# Altium PCB MAGI'sDIPBoard-2x.PcbDoc
Units mil, origin at the board's own origin, x right, y up, seen from the top; angles counter-clockwise.
Board outline 6000 x 4000 mil, 2 copper layers (Top Layer, Bottom Layer); 5 components, 49 nets, 109 pads, 0 vias.
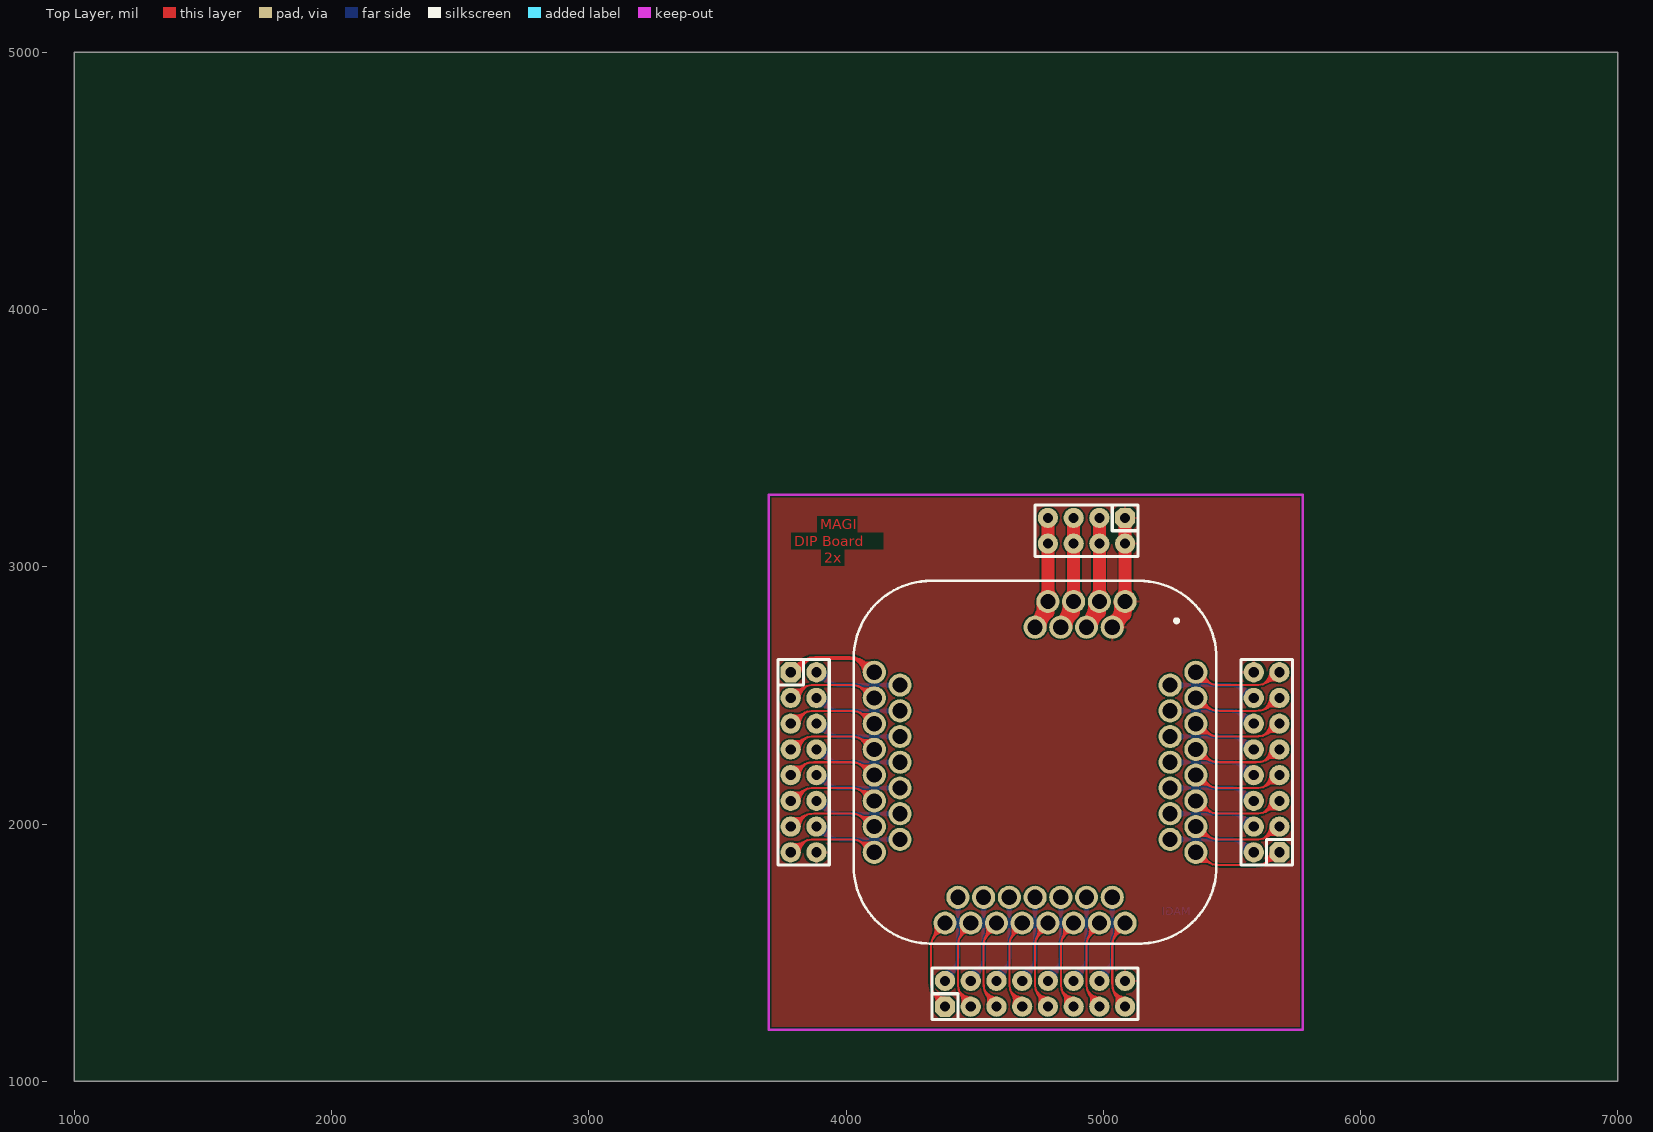
[diagram p0: Top Layer view]
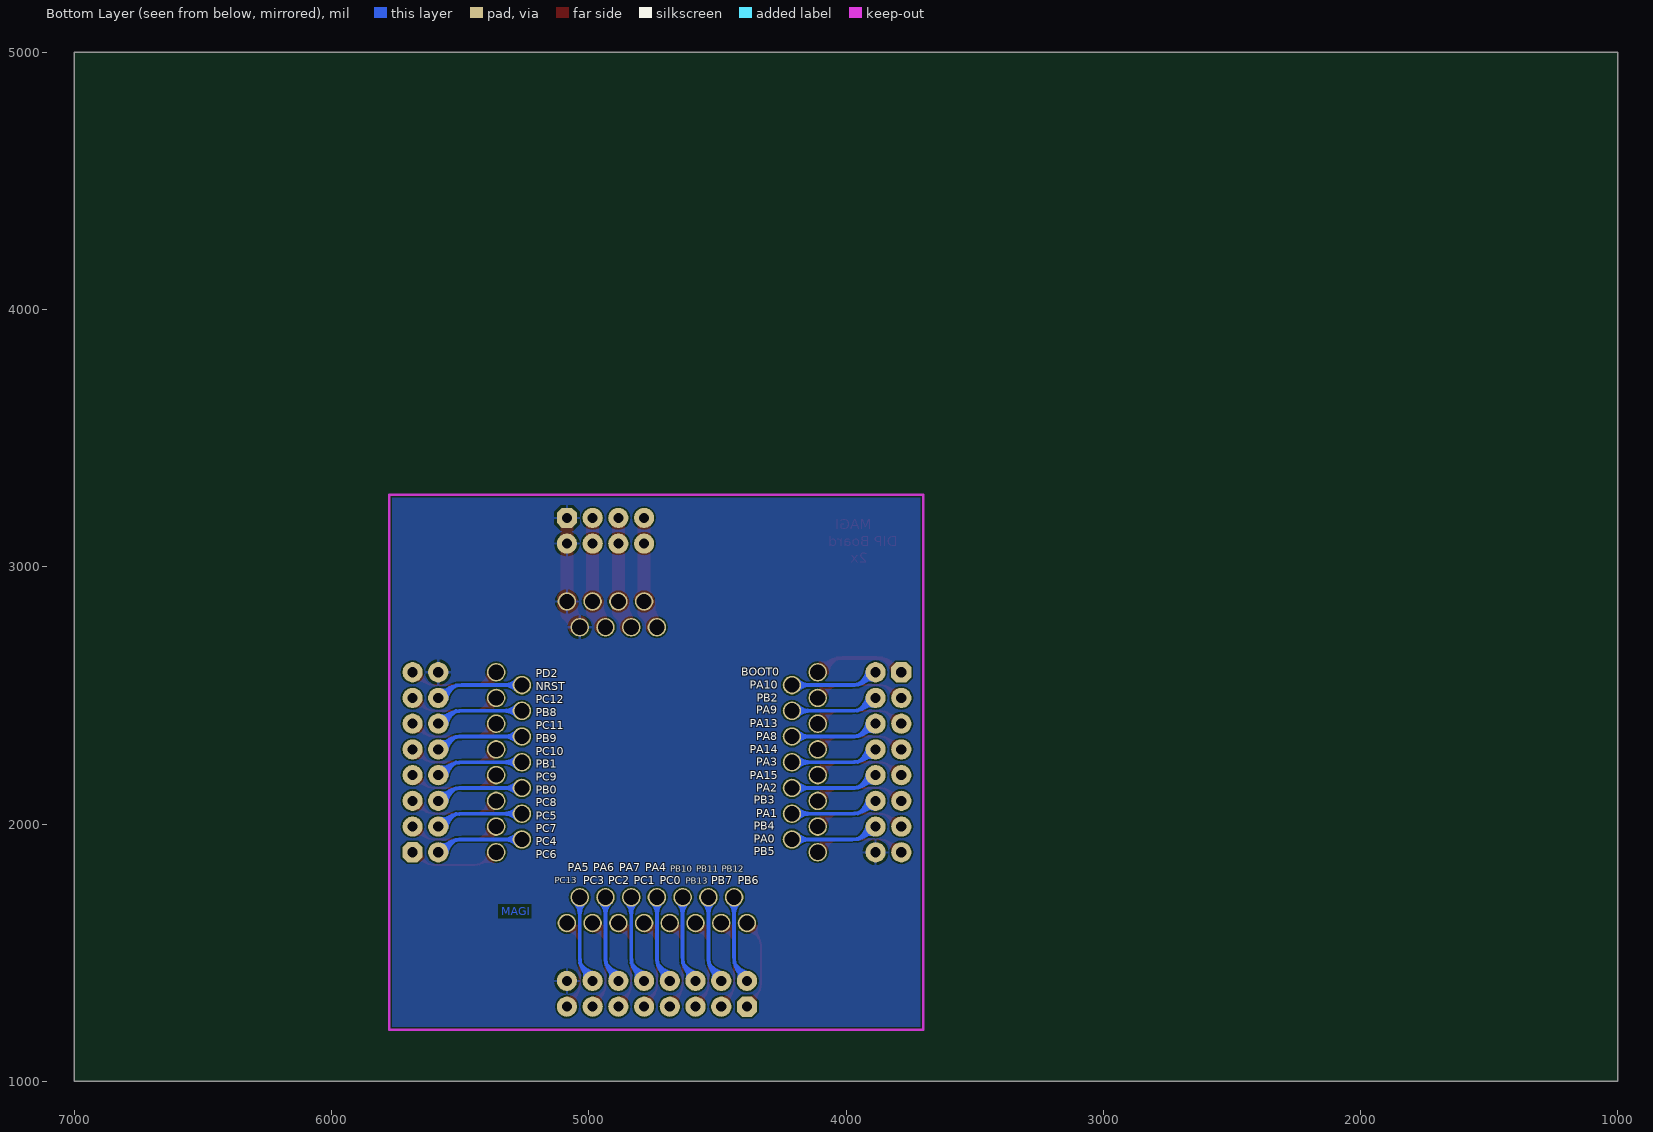
[diagram p1: Bottom Layer view, seen from below]

## Layer stack, top to bottom
Top Solder: solder mask 0.4, Solder Resist, Dk 3.5
Top Layer: signal copper 1.4
Dielectric 1: dielectric 12.6, FR-4, Dk 4.8
Bottom Layer: signal copper 1.4
Bottom Solder: solder mask 0.4, Solder Resist, Dk 3.5

## Board outline
1000,1000 7000,1000 7000,5000 1000,5000

## Design rules (kind name [scope] priority, off if disabled: settings)
Clearance [All] p1: gap=6
PolygonConnect [All] p1: connectstyle=Relief reliefconductorwidth=10 reliefentries=4 polygonreliefangle="90 Angle" airgapwidth=10
RoutingVias [All] p1: holewidth=28 width=50 viastyle="Through Hole" minholewidth=28 minwidth=50 maxholewidth=28 maxwidth=50
SolderMaskExpansion [All] p1: expansion=4
Width [All] p1: maxlimit=100 minlimit=6 preferedwidth=10
29 further rules are at their usual default settings.

## Components (designator, comment, footprint, x,y, rotation, side; value= is the part's Value field where it differs from the comment)
CON1 "" idc10 5085,3190 r180 top
J1 "" MAGIsBoard-2x 4735,2240 r0 top
J2 "" idc16 5685,1890 r90 top
J3 "" idc16 3785,2590 r270 top
J4 "" idc16 4385,1290 r0 top

## Footprints (in the part's own frame and the unit in brackets; to place one, negate y for a bottom-side part, rotate by r counter-clockwise, add the part's x,y. Pads: shape width x height; smd on the part's side, far side on the other; paste and mask are expansions set on the pad)
idc10 [mm]
  oct 2x2 hole 1: 1(0,0)
  round 2 hole 1: 2(0,2.54) 3(2.54,0) 4(2.54,2.54) 5(5.08,0) 6(5.08,2.54) 7(7.62,0) 8(7.62,2.54)
  silkscreen extent -1.27,-1.27 8.89,3.81
idc16 [mm]
  oct 2x2 hole 1: 1(0,0)
  round 2 hole 1: 2(0,2.54) 3(2.54,0) 4(2.54,2.54) 5(5.08,0) 6(5.08,2.54) 7(7.62,0) 8(7.62,2.54) 9(10.16,0) 10(10.16,2.54) 11(12.7,0) 12(12.7,2.54) 13(15.24,0) 14(15.24,2.54) 15(17.78,0) 16(17.78,2.54)
  silkscreen extent -1.27,-1.27 19.05,3.81
MAGIsBoard-2x [mil]
  round 90 / inner round 90 / far side round 72 hole 59.06: 1(300,525) 1(350,625) 2(200,525) 2(250,625) 3(100,525) 3(150,625) 4(0,525) 4(50,625) 8(-525,300) 9(-525,200) 10(-525,100) 11(-525,0) 12(-525,-100) 13(-525,-200) 14(-525,-300) 15(-300,-525) 16(-200,-525) 17(-100,-525) 18(0,-525) 19(100,-525) 20(200,-525) 21(300,-525) 22(525,-300) 23(525,-200) 24(525,-100) 25(525,0) 26(525,100) 27(525,200) 28(525,300) 29(-625,350) 30(-625,250) 31(-625,150) 32(-625,50) 33(-625,-50) 34(-625,-150) 35(-625,-250) 36(-625,-350) 37(-350,-625) 38(-250,-625) 39(-150,-625) 40(-50,-625) 41(50,-625) 42(150,-625) 43(250,-625) 44(350,-625) 45(625,-350) 46(625,-250) 47(625,-150) 48(625,-50) 49(625,50) 50(625,150) 51(625,250) 52(625,350)
  silkscreen extent -705,-705 705,705

## Part data
CON1: library part CON10_1, "Connector"
J1: library part MAGIsBoard-2x
J2 J3 J4: library part CON16, "Connector"

## Nets (pads, with @x,y where several pads share a name; then routed paths per layer and width w, separated by ;. In a path a pad name is that pad's centre, name@x,y a point inside that pad or via, vN(x,y) a via of type N, cw(c..) or ccw(c..) an arc to the next point about the centre after c; other vN are vias at no path point)
GND: CON1.1 CON1.2 J1.1 J2.16 J3.16 J4.16 | length 854.2
  Top Layer w50: J1.1@5029.82,2784.32 ccw(c5017.33,2830.96) 5059.14,2806.82 ccw(c5100.95,2782.67) J1.1@5054.32,2770.18 ; J1.1@5035,2785 ccw(c5035,2833.28) 5069.14,2799.14 ccw(c5103.28,2765) J1.1@5055,2765 ; J1.1@5065.31,2861.49 cw(c4957.73,2842.28) 5035,2765 5085,2815 5085,2865 CON1.2 CON1.1 ; J1.1@5070.86,2850.86 cw(c5036.72,2816.72) 5085,2816.72 cw(c5133.28,2816.72) J1.1@5099.14,2850.86 ; J1.1@5070.86,2879.14 ccw(c5036.72,2913.28) 5085,2913.28 ccw(c5133.28,2913.28) J1.1@5099.14,2879.14
NetCON1_3: CON1.3 CON1.4 J1.2 | length 719.8
  Top Layer w50: J1.2@4935,2765 J1.2@4935,2772.48 ; J1.2@4954.32,2770.18 cw(c5013.29,2785.98) 4960.42,2816.5 ; J1.2@4955,2765 cw(c5021.34,2765) 4974.43,2811.91 ; J1.2@4965.19,2862.27 cw(c4859.73,2847.75) J1.2@4935,2772.48 ; J1.2@4970.86,2879.14 ccw(c4936.72,2913.28) 4985,2913.28 ccw(c5033.28,2913.28) J1.2@4999.14,2879.14 ; CON1.3 CON1.4 4985,2865 4985,2822.48 J1.2@4935,2772.48
NetCON1_5: CON1.5 CON1.6 J1.3 | length 719.8
  Top Layer w50: J1.3@4835,2765 J1.3@4835,2772.48 ; J1.3@4854.32,2770.18 cw(c4913.29,2785.98) 4860.42,2816.5 ; J1.3@4855,2765 cw(c4921.34,2765) 4874.43,2811.91 ; J1.3@4865.19,2862.27 cw(c4759.73,2847.75) J1.3@4835,2772.48 ; J1.3@4870.86,2879.14 ccw(c4836.72,2913.28) 4885,2913.28 ccw(c4933.28,2913.28) J1.3@4899.14,2879.14 ; CON1.5 CON1.6 4885,2865 4885,2822.48 J1.3@4835,2772.48
NetCON1_7: CON1.7 CON1.8 J1.4 | length 719.8
  Top Layer w50: J1.4@4735,2765 J1.4@4735,2772.48 ; J1.4@4754.32,2770.18 cw(c4813.29,2785.98) 4760.42,2816.5 ; J1.4@4755,2765 cw(c4821.34,2765) 4774.43,2811.91 ; J1.4@4765.19,2862.27 cw(c4659.73,2847.75) J1.4@4735,2772.48 ; J1.4@4770.86,2879.14 ccw(c4736.72,2913.28) 4785,2913.28 ccw(c4833.28,2913.28) J1.4@4799.14,2879.14 ; CON1.7 CON1.8 4785,2865 4785,2822.48 J1.4@4735,2772.48
NetJ1_8: J1.8 J3.2 | length 602.8
  Bottom Layer w15: J3.2 3905.71,2569.29 ccw(c3976.42,2640) 3976.42,2540 J1.8 ; J3.2@3893.25,2559.22 cw(c3906.46,2509.9) 3931.99,2554.12 ; J3.2@3901.62,2592.9 ccw(c3952.2,2601.74) 3926.53,2557.27 ; J3.2@3916.39,2595.48 ccw(c3993.42,2608.94) 3954.33,2541.22 ; J1.8@4189.85,2519.85 ccw(c4141.19,2471.19) 4141.19,2540 ccw(c4141.19,2608.81) J1.8@4189.85,2560.15
NetJ1_9: J1.9 J3.4 | length 602.8
  Bottom Layer w15: J3.4 3905.71,2469.29 ccw(c3976.42,2540) 3976.42,2440 J1.9 ; J3.4@3893.25,2459.22 cw(c3906.46,2409.9) 3931.99,2454.12 ; J3.4@3901.62,2492.9 ccw(c3952.2,2501.74) 3926.53,2457.27 ; J3.4@3916.39,2495.48 ccw(c3993.42,2508.94) 3954.33,2441.22 ; J1.9@4189.85,2419.85 ccw(c4141.19,2371.19) 4141.19,2440 ccw(c4141.19,2508.81) J1.9@4189.85,2460.15
NetJ1_10: J1.10 J3.6 | length 602.8
  Bottom Layer w15: J3.6 3905.71,2369.29 ccw(c3976.42,2440) 3976.42,2340 J1.10 ; J3.6@3893.25,2359.22 cw(c3906.46,2309.9) 3931.99,2354.12 ; J3.6@3901.62,2392.9 ccw(c3952.2,2401.74) 3926.53,2357.27 ; J3.6@3916.39,2395.48 ccw(c3993.42,2408.94) 3954.33,2341.22 ; J1.10@4189.85,2319.85 ccw(c4141.19,2271.19) 4141.19,2340 ccw(c4141.19,2408.81) J1.10@4189.85,2360.15
NetJ1_11: J1.11 J3.8 | length 602.8
  Bottom Layer w15: J3.8 3905.71,2269.29 ccw(c3976.42,2340) 3976.42,2240 J1.11 ; J3.8@3893.25,2259.22 cw(c3906.46,2209.9) 3931.99,2254.12 ; J3.8@3901.62,2292.9 ccw(c3952.2,2301.74) 3926.53,2257.27 ; J3.8@3916.39,2295.48 ccw(c3993.42,2308.94) 3954.33,2241.22 ; J1.11@4189.85,2219.85 ccw(c4141.19,2171.19) 4141.19,2240 ccw(c4141.19,2308.81) J1.11@4189.85,2260.15
NetJ1_12: J1.12 J3.10 | length 602.8
  Bottom Layer w15: J3.10 3905.71,2169.29 ccw(c3976.42,2240) 3976.42,2140 J1.12 ; J3.10@3893.25,2159.22 cw(c3906.46,2109.9) 3931.99,2154.12 ; J3.10@3901.62,2192.9 ccw(c3952.2,2201.74) 3926.53,2157.27 ; J3.10@3916.39,2195.48 ccw(c3993.42,2208.94) 3954.33,2141.22 ; J1.12@4189.85,2119.85 ccw(c4141.19,2071.19) 4141.19,2140 ccw(c4141.19,2208.81) J1.12@4189.85,2160.15
NetJ1_13: J1.13 J3.12 | length 602.8
  Bottom Layer w15: J3.12 3905.71,2069.29 ccw(c3976.42,2140) 3976.42,2040 J1.13 ; J3.12@3893.25,2059.22 cw(c3906.46,2009.9) 3931.99,2054.12 ; J3.12@3901.62,2092.9 ccw(c3952.2,2101.74) 3926.53,2057.27 ; J3.12@3916.39,2095.48 ccw(c3993.42,2108.94) 3954.33,2041.22 ; J1.13@4189.85,2019.85 ccw(c4141.19,1971.19) 4141.19,2040 ccw(c4141.19,2108.81) J1.13@4189.85,2060.15
NetJ1_14: J1.14 J3.14 | length 602.8
  Bottom Layer w15: J3.14 3905.71,1969.29 ccw(c3976.42,2040) 3976.42,1940 J1.14 ; J3.14@3893.25,1959.22 cw(c3906.46,1909.9) 3931.99,1954.12 ; J3.14@3901.62,1992.9 ccw(c3952.2,2001.74) 3926.53,1957.27 ; J3.14@3916.39,1995.48 ccw(c3993.42,2008.94) 3954.33,1941.22 ; J1.14@4189.85,1919.85 ccw(c4141.19,1871.19) 4141.19,1940 ccw(c4141.19,2008.81) J1.14@4189.85,1960.15
NetJ1_15: J1.15 J4.2 | length 602.8
  Bottom Layer w15: J4.2@4379.52,1421.39 ccw(c4366.06,1498.42) 4433.78,1459.33 ; J4.2@4382.1,1406.62 ccw(c4373.26,1457.2) 4417.73,1431.53 ; J4.2 4405.71,1410.71 ccw(c4335,1481.42) 4435,1481.42 J1.15 ; J1.15@4414.85,1694.85 cw(c4366.19,1646.19) 4435,1646.19 cw(c4503.81,1646.19) J1.15@4455.15,1694.85 ; J4.2@4415.78,1398.25 cw(c4465.1,1411.46) 4420.88,1436.99
NetJ1_16: J1.16 J4.4 | length 602.8
  Bottom Layer w15: J4.4@4479.52,1421.39 ccw(c4466.06,1498.42) 4533.78,1459.33 ; J4.4@4482.1,1406.62 ccw(c4473.26,1457.2) 4517.73,1431.53 ; J4.4 4505.71,1410.71 ccw(c4435,1481.42) 4535,1481.42 J1.16 ; J1.16@4514.85,1694.85 cw(c4466.19,1646.19) 4535,1646.19 cw(c4603.81,1646.19) J1.16@4555.15,1694.85 ; J4.4@4515.78,1398.25 cw(c4565.1,1411.46) 4520.88,1436.99
NetJ1_17: J1.17 J4.6 | length 602.8
  Bottom Layer w15: J4.6@4579.52,1421.39 ccw(c4566.06,1498.42) 4633.78,1459.33 ; J4.6@4582.1,1406.62 ccw(c4573.26,1457.2) 4617.73,1431.53 ; J4.6 4605.71,1410.71 ccw(c4535,1481.42) 4635,1481.42 J1.17 ; J1.17@4614.85,1694.85 cw(c4566.19,1646.19) 4635,1646.19 cw(c4703.81,1646.19) J1.17@4655.15,1694.85 ; J4.6@4615.78,1398.25 cw(c4665.1,1411.46) 4620.88,1436.99
NetJ1_18: J1.18 J4.8 | length 602.8
  Bottom Layer w15: J4.8@4679.52,1421.39 ccw(c4666.06,1498.42) 4733.78,1459.33 ; J4.8@4682.1,1406.62 ccw(c4673.26,1457.2) 4717.73,1431.53 ; J4.8 4705.71,1410.71 ccw(c4635,1481.42) 4735,1481.42 J1.18 ; J1.18@4714.85,1694.85 cw(c4666.19,1646.19) 4735,1646.19 cw(c4803.81,1646.19) J1.18@4755.15,1694.85 ; J4.8@4715.78,1398.25 cw(c4765.1,1411.46) 4720.88,1436.99
NetJ1_19: J1.19 J4.10 | length 602.8
  Bottom Layer w15: J4.10@4779.52,1421.39 ccw(c4766.06,1498.42) 4833.78,1459.33 ; J4.10@4782.1,1406.62 ccw(c4773.26,1457.2) 4817.73,1431.53 ; J4.10 4805.71,1410.71 ccw(c4735,1481.42) 4835,1481.42 J1.19 ; J1.19@4814.85,1694.85 cw(c4766.19,1646.19) 4835,1646.19 cw(c4903.81,1646.19) J1.19@4855.15,1694.85 ; J4.10@4815.78,1398.25 cw(c4865.1,1411.46) 4820.88,1436.99
NetJ1_20: J1.20 J4.12 | length 602.8
  Bottom Layer w15: J4.12@4879.52,1421.39 ccw(c4866.06,1498.42) 4933.78,1459.33 ; J4.12@4882.1,1406.62 ccw(c4873.26,1457.2) 4917.73,1431.53 ; J4.12 4905.71,1410.71 ccw(c4835,1481.42) 4935,1481.42 J1.20 ; J1.20@4914.85,1694.85 cw(c4866.19,1646.19) 4935,1646.19 cw(c5003.81,1646.19) J1.20@4955.15,1694.85 ; J4.12@4915.78,1398.25 cw(c4965.1,1411.46) 4920.88,1436.99
NetJ1_21: J1.21 J4.14 | length 602.8
  Bottom Layer w15: J4.14@4979.52,1421.39 ccw(c4966.06,1498.42) 5033.78,1459.33 ; J4.14@4982.1,1406.62 ccw(c4973.26,1457.2) 5017.73,1431.53 ; J4.14 5005.71,1410.71 ccw(c4935,1481.42) 5035,1481.42 J1.21 ; J1.21@5014.85,1694.85 cw(c4966.19,1646.19) 5035,1646.19 cw(c5103.81,1646.19) J1.21@5055.15,1694.85 ; J4.14@5015.78,1398.25 cw(c5065.1,1411.46) 5020.88,1436.99
NetJ1_22: J1.22 J2.2 | length 602.8
  Bottom Layer w15: J1.22 5493.58,1940 cw(c5493.58,1840) 5564.29,1910.71 J2.2 ; J1.22@5280.15,1919.85 cw(c5328.81,1871.19) 5328.81,1940 cw(c5328.81,2008.81) J1.22@5280.15,1960.15 ; 5515.67,1938.78 cw(c5476.58,1871.06) J2.2@5553.61,1884.52 ; 5538.01,1925.88 ccw(c5563.54,1970.1) J2.2@5576.75,1920.78 ; 5543.47,1922.73 cw(c5517.8,1878.26) J2.2@5568.38,1887.1
NetJ1_23: J1.23 J2.4 | length 602.8
  Bottom Layer w15: J1.23 5493.58,2040 cw(c5493.58,1940) 5564.29,2010.71 J2.4 ; J1.23@5280.15,2019.85 cw(c5328.81,1971.19) 5328.81,2040 cw(c5328.81,2108.81) J1.23@5280.15,2060.15 ; 5515.67,2038.78 cw(c5476.58,1971.06) J2.4@5553.61,1984.52 ; 5538.01,2025.88 ccw(c5563.54,2070.1) J2.4@5576.75,2020.78 ; 5543.47,2022.73 cw(c5517.8,1978.26) J2.4@5568.38,1987.1
NetJ1_24: J1.24 J2.6 | length 602.8
  Bottom Layer w15: J1.24 5493.58,2140 cw(c5493.58,2040) 5564.29,2110.71 J2.6 ; J1.24@5280.15,2119.85 cw(c5328.81,2071.19) 5328.81,2140 cw(c5328.81,2208.81) J1.24@5280.15,2160.15 ; 5515.67,2138.78 cw(c5476.58,2071.06) J2.6@5553.61,2084.52 ; 5538.01,2125.88 ccw(c5563.54,2170.1) J2.6@5576.75,2120.78 ; 5543.47,2122.73 cw(c5517.8,2078.26) J2.6@5568.38,2087.1
NetJ1_25: J1.25 J2.8 | length 602.8
  Bottom Layer w15: J1.25 5493.58,2240 cw(c5493.58,2140) 5564.29,2210.71 J2.8 ; J1.25@5280.15,2219.85 cw(c5328.81,2171.19) 5328.81,2240 cw(c5328.81,2308.81) J1.25@5280.15,2260.15 ; 5515.67,2238.78 cw(c5476.58,2171.06) J2.8@5553.61,2184.52 ; 5538.01,2225.88 ccw(c5563.54,2270.1) J2.8@5576.75,2220.78 ; 5543.47,2222.73 cw(c5517.8,2178.26) J2.8@5568.38,2187.1
NetJ1_26: J1.26 J2.10 | length 602.8
  Bottom Layer w15: J1.26 5493.58,2340 cw(c5493.58,2240) 5564.29,2310.71 J2.10 ; J1.26@5280.15,2319.85 cw(c5328.81,2271.19) 5328.81,2340 cw(c5328.81,2408.81) J1.26@5280.15,2360.15 ; 5515.67,2338.78 cw(c5476.58,2271.06) J2.10@5553.61,2284.52 ; 5538.01,2325.88 ccw(c5563.54,2370.1) J2.10@5576.75,2320.78 ; 5543.47,2322.73 cw(c5517.8,2278.26) J2.10@5568.38,2287.1
NetJ1_27: J1.27 J2.12 | length 602.8
  Bottom Layer w15: J1.27 5493.58,2440 cw(c5493.58,2340) 5564.29,2410.71 J2.12 ; J1.27@5280.15,2419.85 cw(c5328.81,2371.19) 5328.81,2440 cw(c5328.81,2508.81) J1.27@5280.15,2460.15 ; 5515.67,2438.78 cw(c5476.58,2371.06) J2.12@5553.61,2384.52 ; 5538.01,2425.88 ccw(c5563.54,2470.1) J2.12@5576.75,2420.78 ; 5543.47,2422.73 cw(c5517.8,2378.26) J2.12@5568.38,2387.1
NetJ1_28: J1.28 J2.14 | length 602.8
  Bottom Layer w15: J1.28 5493.58,2540 cw(c5493.58,2440) 5564.29,2510.71 J2.14 ; J1.28@5280.15,2519.85 cw(c5328.81,2471.19) 5328.81,2540 cw(c5328.81,2608.81) J1.28@5280.15,2560.15 ; 5515.67,2538.78 cw(c5476.58,2471.06) J2.14@5553.61,2484.52 ; 5538.01,2525.88 ccw(c5563.54,2570.1) J2.14@5576.75,2520.78 ; 5543.47,2522.73 cw(c5517.8,2478.26) J2.14@5568.38,2487.1
NetJ1_29: J1.29 J3.1 | length 696.7
  Top Layer w15: J3.1 3810.71,2615.71 cw(c3881.42,2545) 3881.42,2645 4013.58,2645 cw(c4013.58,2545) 4084.29,2615.71 J1.29 ; J3.1@3793.25,2620.78 ccw(c3804.85,2664.07) 3827.25,2625.26 ; J3.1@3801.51,2586.55 cw(c3862.18,2573.86) 3831.19,2627.54 ; J3.1@3816.2,2583.48 cw(c3906.24,2564.64) 3860.24,2644.31 ; 4034.76,2644.31 cw(c3996.37,2577.81) J1.29@4072.71,2586 ; 4055.98,2632.06 ccw(c4085.18,2682.63) J1.29@4100.29,2626.22 ; 4060.32,2629.55 cw(c4032.7,2581.71) J1.29@4087.63,2587.6
NetJ1_30: J1.30 J3.3 | length 780.7
  Top Layer w8: J3.3 3805.71,2510.71 cw(c3876.42,2440) 3876.42,2540 4018.58,2540 cw(c4018.58,2440) 4089.29,2510.71 J1.30 ; J3.3@3791.53,2516.58 ccw(c3801.61,2557.57) 3823.47,2521.46 ; J3.3@3793.44,2524.35 ccw(c3808.13,2584.09) 3839.99,2531.46 ; J3.3@3804.35,2489.02 cw(c3844.92,2486.96) 3823.88,2521.71 ; J3.3@3812.33,2488.61 cw(c3863.1,2486.03) 3836.78,2529.52 ; J3.3@3820.32,2488.21 cw(c3881.29,2485.11) 3849.68,2537.33 ; 4043.92,2536.91 ccw(c4080.47,2600.21) J1.30@4099.39,2529.6 ; 4052.71,2531.83 cw(c4028.43,2489.76) J1.30@4077,2489.9 ; 4060.64,2527.25 ccw(c4087.54,2573.83) J1.30@4101.46,2521.88 ; 4064.75,2524.88 cw(c4044.51,2489.81) J1.30@4085,2489.93
NetJ1_31: J1.31 J3.5 | length 780.7
  Top Layer w8: J3.5 3805.71,2410.71 cw(c3876.42,2340) 3876.42,2440 4018.58,2440 cw(c4018.58,2340) 4089.29,2410.71 J1.31 ; J3.5@3791.53,2416.58 ccw(c3801.61,2457.57) 3823.47,2421.46 ; J3.5@3793.44,2424.35 ccw(c3808.13,2484.09) 3839.99,2431.46 ; J3.5@3804.35,2389.02 cw(c3844.92,2386.96) 3823.88,2421.71 ; J3.5@3812.33,2388.61 cw(c3863.1,2386.03) 3836.78,2429.52 ; J3.5@3820.32,2388.21 cw(c3881.29,2385.11) 3849.68,2437.33 ; 4043.92,2436.91 ccw(c4080.47,2500.21) J1.31@4099.39,2429.6 ; 4052.71,2431.83 cw(c4028.43,2389.76) J1.31@4077,2389.9 ; 4060.64,2427.25 ccw(c4087.54,2473.83) J1.31@4101.46,2421.88 ; 4064.75,2424.88 cw(c4044.51,2389.81) J1.31@4085,2389.93
NetJ1_32: J1.32 J3.7 | length 780.7
  Top Layer w8: J3.7 3805.71,2310.71 cw(c3876.42,2240) 3876.42,2340 4018.58,2340 cw(c4018.58,2240) 4089.29,2310.71 J1.32 ; J3.7@3791.53,2316.58 ccw(c3801.61,2357.57) 3823.47,2321.46 ; J3.7@3793.44,2324.35 ccw(c3808.13,2384.09) 3839.99,2331.46 ; J3.7@3804.35,2289.02 cw(c3844.92,2286.96) 3823.88,2321.71 ; J3.7@3812.33,2288.61 cw(c3863.1,2286.03) 3836.78,2329.52 ; J3.7@3820.32,2288.21 cw(c3881.29,2285.11) 3849.68,2337.33 ; 4043.92,2336.91 ccw(c4080.47,2400.21) J1.32@4099.39,2329.6 ; 4052.71,2331.83 cw(c4028.43,2289.76) J1.32@4077,2289.9 ; 4060.64,2327.25 ccw(c4087.54,2373.83) J1.32@4101.46,2321.88 ; 4064.75,2324.88 cw(c4044.51,2289.81) J1.32@4085,2289.93
NetJ1_33: J1.33 J3.9 | length 780.7
  Top Layer w8: J3.9 3805.71,2210.71 cw(c3876.42,2140) 3876.42,2240 4018.58,2240 cw(c4018.58,2140) 4089.29,2210.71 J1.33 ; J3.9@3791.53,2216.58 ccw(c3801.61,2257.57) 3823.47,2221.46 ; J3.9@3793.44,2224.35 ccw(c3808.13,2284.09) 3839.99,2231.46 ; J3.9@3804.35,2189.02 cw(c3844.92,2186.96) 3823.88,2221.71 ; J3.9@3812.33,2188.61 cw(c3863.1,2186.03) 3836.78,2229.52 ; J3.9@3820.32,2188.21 cw(c3881.29,2185.11) 3849.68,2237.33 ; 4043.92,2236.91 ccw(c4080.47,2300.21) J1.33@4099.39,2229.6 ; 4052.71,2231.83 cw(c4028.43,2189.76) J1.33@4077,2189.9 ; 4060.64,2227.25 ccw(c4087.54,2273.83) J1.33@4101.46,2221.88 ; 4064.75,2224.88 cw(c4044.51,2189.81) J1.33@4085,2189.93
NetJ1_34: J1.34 J3.11 | length 780.7
  Top Layer w8: J3.11 3805.71,2110.71 cw(c3876.42,2040) 3876.42,2140 4018.58,2140 cw(c4018.58,2040) 4089.29,2110.71 J1.34 ; J3.11@3791.53,2116.58 ccw(c3801.61,2157.57) 3823.47,2121.46 ; J3.11@3793.44,2124.35 ccw(c3808.13,2184.09) 3839.99,2131.46 ; J3.11@3804.35,2089.02 cw(c3844.92,2086.96) 3823.88,2121.71 ; J3.11@3812.33,2088.61 cw(c3863.1,2086.03) 3836.78,2129.52 ; J3.11@3820.32,2088.21 cw(c3881.29,2085.11) 3849.68,2137.33 ; 4043.92,2136.91 ccw(c4080.47,2200.21) J1.34@4099.39,2129.6 ; 4052.71,2131.83 cw(c4028.43,2089.76) J1.34@4077,2089.9 ; 4060.64,2127.25 ccw(c4087.54,2173.83) J1.34@4101.46,2121.88 ; 4064.75,2124.88 cw(c4044.51,2089.81) J1.34@4085,2089.93
NetJ1_35: J1.35 J3.13 | length 780.7
  Top Layer w8: J3.13 3805.71,2010.71 cw(c3876.42,1940) 3876.42,2040 4018.58,2040 cw(c4018.58,1940) 4089.29,2010.71 J1.35 ; J3.13@3791.53,2016.58 ccw(c3801.61,2057.57) 3823.47,2021.46 ; J3.13@3793.44,2024.35 ccw(c3808.13,2084.09) 3839.99,2031.46 ; J3.13@3804.35,1989.02 cw(c3844.92,1986.96) 3823.88,2021.71 ; J3.13@3812.33,1988.61 cw(c3863.1,1986.03) 3836.78,2029.52 ; J3.13@3820.32,1988.21 cw(c3881.29,1985.11) 3849.68,2037.33 ; 4043.92,2036.91 ccw(c4080.47,2100.21) J1.35@4099.39,2029.6 ; 4052.71,2031.83 cw(c4028.43,1989.76) J1.35@4077,1989.9 ; 4060.64,2027.25 ccw(c4087.54,2073.83) J1.35@4101.46,2021.88 ; 4064.75,2024.88 cw(c4044.51,1989.81) J1.35@4085,1989.93
NetJ1_36: J1.36 J3.15 | length 780.7
  Top Layer w8: J3.15 3805.71,1910.71 cw(c3876.42,1840) 3876.42,1940 4018.58,1940 cw(c4018.58,1840) 4089.29,1910.71 J1.36 ; J3.15@3791.53,1916.58 ccw(c3801.61,1957.57) 3823.47,1921.46 ; J3.15@3793.44,1924.35 ccw(c3808.13,1984.09) 3839.99,1931.46 ; J3.15@3804.35,1889.02 cw(c3844.92,1886.96) 3823.88,1921.71 ; J3.15@3812.33,1888.61 cw(c3863.1,1886.03) 3836.78,1929.52 ; J3.15@3820.32,1888.21 cw(c3881.29,1885.11) 3849.68,1937.33 ; 4043.92,1936.91 ccw(c4080.47,2000.21) J1.36@4099.39,1929.6 ; 4052.71,1931.83 cw(c4028.43,1889.76) J1.36@4077,1889.9 ; 4060.64,1927.25 ccw(c4087.54,1973.83) J1.36@4101.46,1921.88 ; 4064.75,1924.88 cw(c4044.51,1889.81) J1.36@4085,1889.93
NetJ1_37: J1.37 J4.1 | length 824.5
  Top Layer w8: 4334.71,1353.65 ccw(c4386.76,1387.37) J4.1@4385.64,1325.36 ; 4337.45,1552.91 ccw(c4278.38,1588.37) J1.37@4345.22,1605.06 ; 4339.24,1555.89 cw(c4385.37,1528.2) J1.37@4385.14,1582 ; 4342.17,1342.14 cw(c4292.28,1309.82) J4.1@4350.41,1297.39 ; 4342.89,1341.03 ccw(c4386.43,1369.24) J4.1@4385.49,1317.37 ; 4346.55,1568.07 cw(c4385.3,1544.8) J1.37@4385.11,1590 ; 4347.39,1569.47 ccw(c4304.88,1594.99) J1.37@4352.98,1607 ; 4351.06,1328.41 ccw(c4386.1,1351.11) J4.1@4385.35,1309.37 ; 4352.67,1325.93 cw(c4318.99,1304.11) J4.1@4358.23,1295.72 ; 4353.86,1580.24 cw(c4385.23,1561.41) J1.37@4385.07,1598 ; J4.1 4359.29,1315.71 cw(c4430,1386.42) 4330,1386.42 4330,1518.58 cw(c4430,1518.58) 4359.29,1589.29 J1.37
NetJ1_38: J1.38 J4.3 | length 780.7
  Top Layer w8: 4437.67,1354.68 ccw(c4489.89,1386.29) J4.3@4486.79,1325.32 ; 4438.09,1548.92 ccw(c4374.79,1585.47) J1.38@4445.4,1604.39 ; 4443.17,1557.71 cw(c4485.24,1533.43) J1.38@4485.1,1582 ; 4443.54,1344.99 cw(c4390.91,1313.13) J4.3@4450.65,1298.44 ; 4445.48,1341.78 ccw(c4488.97,1368.1) J4.3@4486.39,1317.33 ; 4447.75,1565.64 ccw(c4401.17,1592.54) J1.38@4453.12,1606.46 ; 4450.12,1569.75 cw(c4485.19,1549.51) J1.38@4485.07,1590 ; 4453.29,1328.88 ccw(c4488.04,1349.92) J4.3@4485.98,1309.35 ; 4453.54,1328.47 cw(c4417.43,1306.61) J4.3@4458.42,1296.53 ; J4.3 4464.29,1310.71 cw(c4535,1381.42) 4435,1381.42 4435,1523.58 cw(c4535,1523.58) 4464.29,1594.29 J1.38
NetJ1_39: J1.39 J4.5 | length 780.7
  Top Layer w8: 4537.67,1354.68 ccw(c4589.89,1386.29) J4.5@4586.79,1325.32 ; 4538.09,1548.92 ccw(c4474.79,1585.47) J1.39@4545.4,1604.39 ; 4543.17,1557.71 cw(c4585.24,1533.43) J1.39@4585.1,1582 ; 4543.54,1344.99 cw(c4490.91,1313.13) J4.5@4550.65,1298.44 ; 4545.48,1341.78 ccw(c4588.97,1368.1) J4.5@4586.39,1317.33 ; 4547.75,1565.64 ccw(c4501.17,1592.54) J1.39@4553.12,1606.46 ; 4550.12,1569.75 cw(c4585.19,1549.51) J1.39@4585.07,1590 ; 4553.29,1328.88 ccw(c4588.04,1349.92) J4.5@4585.98,1309.35 ; 4553.54,1328.47 cw(c4517.43,1306.61) J4.5@4558.42,1296.53 ; J4.5 4564.29,1310.71 cw(c4635,1381.42) 4535,1381.42 4535,1523.58 cw(c4635,1523.58) 4564.29,1594.29 J1.39
NetJ1_40: J1.40 J4.7 | length 780.7
  Top Layer w8: 4637.67,1354.68 ccw(c4689.89,1386.29) J4.7@4686.79,1325.32 ; 4638.09,1548.92 ccw(c4574.79,1585.47) J1.40@4645.4,1604.39 ; 4643.17,1557.71 cw(c4685.24,1533.43) J1.40@4685.1,1582 ; 4643.54,1344.99 cw(c4590.91,1313.13) J4.7@4650.65,1298.44 ; 4645.48,1341.78 ccw(c4688.97,1368.1) J4.7@4686.39,1317.33 ; 4647.75,1565.64 ccw(c4601.17,1592.54) J1.40@4653.12,1606.46 ; 4650.12,1569.75 cw(c4685.19,1549.51) J1.40@4685.07,1590 ; 4653.29,1328.88 ccw(c4688.04,1349.92) J4.7@4685.98,1309.35 ; 4653.54,1328.47 cw(c4617.43,1306.61) J4.7@4658.42,1296.53 ; J4.7 4664.29,1310.71 cw(c4735,1381.42) 4635,1381.42 4635,1523.58 cw(c4735,1523.58) 4664.29,1594.29 J1.40
NetJ1_41: J1.41 J4.9 | length 780.7
  Top Layer w8: 4737.67,1354.68 ccw(c4789.89,1386.29) J4.9@4786.79,1325.32 ; 4738.09,1548.92 ccw(c4674.79,1585.47) J1.41@4745.4,1604.39 ; 4743.17,1557.71 cw(c4785.24,1533.43) J1.41@4785.1,1582 ; 4743.54,1344.99 cw(c4690.91,1313.13) J4.9@4750.65,1298.44 ; 4745.48,1341.78 ccw(c4788.97,1368.1) J4.9@4786.39,1317.33 ; 4747.75,1565.64 ccw(c4701.17,1592.54) J1.41@4753.12,1606.46 ; 4750.12,1569.75 cw(c4785.19,1549.51) J1.41@4785.07,1590 ; 4753.29,1328.88 ccw(c4788.04,1349.92) J4.9@4785.98,1309.35 ; 4753.54,1328.47 cw(c4717.43,1306.61) J4.9@4758.42,1296.53 ; J4.9 4764.29,1310.71 cw(c4835,1381.42) 4735,1381.42 4735,1523.58 cw(c4835,1523.58) 4764.29,1594.29 J1.41
NetJ1_42: J1.42 J4.11 | length 780.7
  Top Layer w8: 4837.67,1354.68 ccw(c4889.89,1386.29) J4.11@4886.79,1325.32 ; 4838.09,1548.92 ccw(c4774.79,1585.47) J1.42@4845.4,1604.39 ; 4843.17,1557.71 cw(c4885.24,1533.43) J1.42@4885.1,1582 ; 4843.54,1344.99 cw(c4790.91,1313.13) J4.11@4850.65,1298.44 ; 4845.48,1341.78 ccw(c4888.97,1368.1) J4.11@4886.39,1317.33 ; 4847.75,1565.64 ccw(c4801.17,1592.54) J1.42@4853.12,1606.46 ; 4850.12,1569.75 cw(c4885.19,1549.51) J1.42@4885.07,1590 ; 4853.29,1328.88 ccw(c4888.04,1349.92) J4.11@4885.98,1309.35 ; 4853.54,1328.47 cw(c4817.43,1306.61) J4.11@4858.42,1296.53 ; J4.11 4864.29,1310.71 cw(c4935,1381.42) 4835,1381.42 4835,1523.58 cw(c4935,1523.58) 4864.29,1594.29 J1.42
NetJ1_43: J1.43 J4.13 | length 780.7
  Top Layer w8: 4937.67,1354.68 ccw(c4989.89,1386.29) J4.13@4986.79,1325.32 ; 4938.09,1548.92 ccw(c4874.79,1585.47) J1.43@4945.4,1604.39 ; 4943.17,1557.71 cw(c4985.24,1533.43) J1.43@4985.1,1582 ; 4943.54,1344.99 cw(c4890.91,1313.13) J4.13@4950.65,1298.44 ; 4945.48,1341.78 ccw(c4988.97,1368.1) J4.13@4986.39,1317.33 ; 4947.75,1565.64 ccw(c4901.17,1592.54) J1.43@4953.12,1606.46 ; 4950.12,1569.75 cw(c4985.19,1549.51) J1.43@4985.07,1590 ; 4953.29,1328.88 ccw(c4988.04,1349.92) J4.13@4985.98,1309.35 ; 4953.54,1328.47 cw(c4917.43,1306.61) J4.13@4958.42,1296.53 ; J4.13 4964.29,1310.71 cw(c5035,1381.42) 4935,1381.42 4935,1523.58 cw(c5035,1523.58) 4964.29,1594.29 J1.43
NetJ1_44: J1.44 J4.15 | length 780.7
  Top Layer w8: 5037.67,1354.68 ccw(c5089.89,1386.29) J4.15@5086.79,1325.32 ; 5038.09,1548.92 ccw(c4974.79,1585.47) J1.44@5045.4,1604.39 ; 5043.17,1557.71 cw(c5085.24,1533.43) J1.44@5085.1,1582 ; 5043.54,1344.99 cw(c4990.91,1313.13) J4.15@5050.65,1298.44 ; 5045.48,1341.78 ccw(c5088.97,1368.1) J4.15@5086.39,1317.33 ; 5047.75,1565.64 ccw(c5001.17,1592.54) J1.44@5053.12,1606.46 ; 5050.12,1569.75 cw(c5085.19,1549.51) J1.44@5085.07,1590 ; 5053.29,1328.88 ccw(c5088.04,1349.92) J4.15@5085.98,1309.35 ; 5053.54,1328.47 cw(c5017.43,1306.61) J4.15@5058.42,1296.53 ; J4.15 5064.29,1310.71 cw(c5135,1381.42) 5035,1381.42 5035,1523.58 cw(c5135,1523.58) 5064.29,1594.29 J1.44
NetJ1_45: J1.45 J2.1 | length 780.7
  Top Layer w8: J1.45 5380.71,1869.29 ccw(c5451.42,1940) 5451.42,1840 5593.58,1840 ccw(c5593.58,1940) 5664.29,1869.29 J2.1 ; J1.45@5368.54,1858.12 cw(c5382.46,1806.17) 5409.36,1852.75 ; J1.45@5370.61,1850.4 cw(c5389.53,1779.79) 5426.08,1843.09 ; J1.45@5385,1890.07 ccw(c5425.49,1890.19) 5405.25,1855.12 ; J1.45@5393,1890.1 ccw(c5441.57,1890.24) 5417.29,1848.17 ; 5620.32,1842.67 ccw(c5588.71,1894.89) J2.1@5649.68,1891.79 ; 5630.01,1848.54 cw(c5661.87,1795.91) J2.1@5676.56,1855.65 ; 5633.22,1850.48 ccw(c5606.9,1893.97) J2.1@5657.67,1891.39 ; 5646.12,1858.29 ccw(c5625.08,1893.04) J2.1@5665.65,1890.98 ; 5646.53,1858.54 cw(c5668.39,1822.43) J2.1@5678.47,1863.42
NetJ1_46: J1.46 J2.3 | length 780.7
  Top Layer w8: J1.46 5380.71,1969.29 ccw(c5451.42,2040) 5451.42,1940 5593.58,1940 ccw(c5593.58,2040) 5664.29,1969.29 J2.3 ; J1.46@5368.54,1958.12 cw(c5382.46,1906.17) 5409.36,1952.75 ; J1.46@5370.61,1950.4 cw(c5389.53,1879.79) 5426.08,1943.09 ; J1.46@5385,1990.07 ccw(c5425.49,1990.19) 5405.25,1955.12 ; J1.46@5393,1990.1 ccw(c5441.57,1990.24) 5417.29,1948.17 ; 5620.32,1942.67 ccw(c5588.71,1994.89) J2.3@5649.68,1991.79 ; 5630.01,1948.54 cw(c5661.87,1895.91) J2.3@5676.56,1955.65 ; 5633.22,1950.48 ccw(c5606.9,1993.97) J2.3@5657.67,1991.39 ; 5646.12,1958.29 ccw(c5625.08,1993.04) J2.3@5665.65,1990.98 ; 5646.53,1958.54 cw(c5668.39,1922.43) J2.3@5678.47,1963.42
NetJ1_47: J1.47 J2.5 | length 780.7
  Top Layer w8: J1.47 5380.71,2069.29 ccw(c5451.42,2140) 5451.42,2040 5593.58,2040 ccw(c5593.58,2140) 5664.29,2069.29 J2.5 ; J1.47@5368.54,2058.12 cw(c5382.46,2006.17) 5409.36,2052.75 ; J1.47@5370.61,2050.4 cw(c5389.53,1979.79) 5426.08,2043.09 ; J1.47@5385,2090.07 ccw(c5425.49,2090.19) 5405.25,2055.12 ; J1.47@5393,2090.1 ccw(c5441.57,2090.24) 5417.29,2048.17 ; 5620.32,2042.67 ccw(c5588.71,2094.89) J2.5@5649.68,2091.79 ; 5630.01,2048.54 cw(c5661.87,1995.91) J2.5@5676.56,2055.65 ; 5633.22,2050.48 ccw(c5606.9,2093.97) J2.5@5657.67,2091.39 ; 5646.12,2058.29 ccw(c5625.08,2093.04) J2.5@5665.65,2090.98 ; 5646.53,2058.54 cw(c5668.39,2022.43) J2.5@5678.47,2063.42
NetJ1_48: J1.48 J2.7 | length 780.7
  Top Layer w8: J1.48 5380.71,2169.29 ccw(c5451.42,2240) 5451.42,2140 5593.58,2140 ccw(c5593.58,2240) 5664.29,2169.29 J2.7 ; J1.48@5368.54,2158.12 cw(c5382.46,2106.17) 5409.36,2152.75 ; J1.48@5370.61,2150.4 cw(c5389.53,2079.79) 5426.08,2143.09 ; J1.48@5385,2190.07 ccw(c5425.49,2190.19) 5405.25,2155.12 ; J1.48@5393,2190.1 ccw(c5441.57,2190.24) 5417.29,2148.17 ; 5620.32,2142.67 ccw(c5588.71,2194.89) J2.7@5649.68,2191.79 ; 5630.01,2148.54 cw(c5661.87,2095.91) J2.7@5676.56,2155.65 ; 5633.22,2150.48 ccw(c5606.9,2193.97) J2.7@5657.67,2191.39 ; 5646.12,2158.29 ccw(c5625.08,2193.04) J2.7@5665.65,2190.98 ; 5646.53,2158.54 cw(c5668.39,2122.43) J2.7@5678.47,2163.42
NetJ1_49: J1.49 J2.9 | length 780.7
  Top Layer w8: J1.49 5380.71,2269.29 ccw(c5451.42,2340) 5451.42,2240 5593.58,2240 ccw(c5593.58,2340) 5664.29,2269.29 J2.9 ; J1.49@5368.54,2258.12 cw(c5382.46,2206.17) 5409.36,2252.75 ; J1.49@5370.61,2250.4 cw(c5389.53,2179.79) 5426.08,2243.09 ; J1.49@5385,2290.07 ccw(c5425.49,2290.19) 5405.25,2255.12 ; J1.49@5393,2290.1 ccw(c5441.57,2290.24) 5417.29,2248.17 ; 5620.32,2242.67 ccw(c5588.71,2294.89) J2.9@5649.68,2291.79 ; 5630.01,2248.54 cw(c5661.87,2195.91) J2.9@5676.56,2255.65 ; 5633.22,2250.48 ccw(c5606.9,2293.97) J2.9@5657.67,2291.39 ; 5646.12,2258.29 ccw(c5625.08,2293.04) J2.9@5665.65,2290.98 ; 5646.53,2258.54 cw(c5668.39,2222.43) J2.9@5678.47,2263.42
NetJ1_50: J1.50 J2.11 | length 779.4
  Top Layer w8: J1.50 5380.08,2369.92 ccw(c5450.79,2440.63) 5450.79,2340.63 5594.21,2340.63 ccw(c5594.21,2440.63) 5664.92,2369.92 J2.11 ; J1.50@5368.54,2358.12 cw(c5382.67,2305.41) 5409.95,2352.67 ; J1.50@5370.61,2350.4 cw(c5389.74,2279.03) 5426.68,2343.02 ; J1.50@5385,2389.92 ccw(c5424.34,2389.79) 5404.67,2355.72 ; J1.50@5393,2389.89 ccw(c5440.25,2389.74) 5416.63,2348.82 ; 5620.22,2343.09 ccw(c5588.88,2395.3) J2.11@5649.68,2391.95 ; 5629.57,2348.7 cw(c5661.43,2295.64) J2.11@5676.43,2355.68 ; 5633.16,2350.85 ccw(c5607.08,2394.3) J2.11@5657.67,2391.51 ; 5646.09,2358.62 ccw(c5625.28,2393.29) J2.11@5665.66,2391.07 ; 5646.13,2358.64 cw(c5668.05,2322.14) J2.11@5678.37,2363.45
NetJ1_51: J1.51 J2.13 | length 780.7
  Top Layer w8: J1.51 5380.71,2469.29 ccw(c5451.42,2540) 5451.42,2440 5593.58,2440 ccw(c5593.58,2540) 5664.29,2469.29 J2.13 ; J1.51@5368.54,2458.12 cw(c5382.46,2406.17) 5409.36,2452.75 ; J1.51@5370.61,2450.4 cw(c5389.53,2379.79) 5426.08,2443.09 ; J1.51@5385,2490.07 ccw(c5425.49,2490.19) 5405.25,2455.12 ; J1.51@5393,2490.1 ccw(c5441.57,2490.24) 5417.29,2448.17 ; 5620.32,2442.67 ccw(c5588.71,2494.89) J2.13@5649.68,2491.79 ; 5630.01,2448.54 cw(c5661.87,2395.91) J2.13@5676.56,2455.65 ; 5633.22,2450.48 ccw(c5606.9,2493.97) J2.13@5657.67,2491.39 ; 5646.12,2458.29 ccw(c5625.08,2493.04) J2.13@5665.65,2490.98 ; 5646.53,2458.54 cw(c5668.39,2422.43) J2.13@5678.47,2463.42
NetJ1_52: J1.52 J2.15 | length 779.4
  Top Layer w8: J1.52 5380.08,2569.92 ccw(c5450.79,2640.63) 5450.79,2540.63 5594.21,2540.63 ccw(c5594.21,2640.63) 5664.92,2569.92 J2.15 ; J1.52@5368.54,2558.12 cw(c5382.67,2505.41) 5409.95,2552.67 ; J1.52@5370.61,2550.4 cw(c5389.74,2479.03) 5426.68,2543.02 ; J1.52@5385,2589.92 ccw(c5424.34,2589.79) 5404.67,2555.72 ; J1.52@5393,2589.89 ccw(c5440.25,2589.74) 5416.63,2548.82 ; 5620.22,2543.09 ccw(c5588.88,2595.3) J2.15@5649.68,2591.95 ; 5629.57,2548.7 cw(c5661.43,2495.64) J2.15@5676.43,2555.68 ; 5633.16,2550.85 ccw(c5607.08,2594.3) J2.15@5657.67,2591.51 ; 5646.09,2558.62 ccw(c5625.28,2593.29) J2.15@5665.66,2591.07 ; 5646.13,2558.64 cw(c5668.05,2522.14) J2.15@5678.37,2563.45

## Polygon pours and split planes (outlines as drawn)
GND on Top Layer "Keep-Out Layer-No Net" (solid, pour order 2): 3700,3280.76 5775,3280.76 5775,1200.76 3700,1200.76
GND on Bottom Layer "Keep-Out Layer-No Net" (solid, pour order 4): 3698.08,1202.36 5773.08,1202.36 5773.08,3282.36 3698.08,3282.36

## Keep-outs
Keep-Out Layer:
  lines w10: 3700,1200 5775,1200 5775,3280 3700,3280 3700,1200

## Other copper
Top Layer:
  text "MAGI" at 3900,3145 h39.37
  text "DIP Board" at 3798.09,3080.44 h39.37
  text "2x" at 3915,3015 h39.37

## Silkscreen, mask and mechanical layers (free items; w line width, h text height)
Bottom Overlay:
  text "BOOT0" at 4407.32,2576.42 h31.5
  text "PD2" at 5206.54,2570.51 h31.5
  text "PA10" at 4373.86,2525.24 h31.5
  text "NRST" at 5206.54,2519.33 h31.5
  text "PB2" at 4346.3,2476.02 h31.5
  text "PC12" at 5206.54,2470.12 h31.5
  text "PA9" at 4348.27,2428.78 h31.5
  text "PB8" at 5206.54,2418.94 h31.5
  text "PA13" at 4373.86,2375.63 h31.5
  text "PC11" at 5206.54,2367.76 h31.5
  text "PA8" at 4348.27,2326.42 h31.5
  text "PB9" at 5206.54,2318.54 h31.5
  text "PA14" at 4373.86,2275.24 h31.5
  text "PC10" at 5206.54,2267.36 h31.5
  text "PA3" at 4348.27,2226.02 h31.5
  text "PB1" at 5206.54,2218.15 h31.5
  text "PA15" at 4373.86,2174.84 h31.5
  text "PC9" at 5206.54,2168.94 h31.5
  text "PA2" at 4348.27,2125.63 h31.5
  text "PB0" at 5206.54,2117.76 h31.5
  text "PB3" at 4358.11,2078.39 h31.5
  text "PC8" at 5206.54,2068.54 h31.5
  text "PA1" at 4348.27,2027.2 h31.5
  text "PC5" at 5206.54,2017.36 h31.5
  text "PB4" at 4358.11,1977.99 h31.5
  text "PC7" at 5206.54,1968.15 h31.5
  text "PA0" at 4358.11,1926.81 h31.5
  text "PC4" at 5206.54,1916.97 h31.5
  text "PB5" at 4358.11,1877.6 h31.5
  text "PC6" at 5206.54,1867.76 h31.5
  text "PA4" at 4781.34,1816.57 h31.5
  text "PA7" at 4881.73,1816.57 h31.5
  text "PA6" at 4982.13,1816.57 h31.5
  text "PA5" at 5082.52,1816.57 h31.5
  text "PB12" at 4482.13,1814.61 h23.62
  text "PB11" at 4582.52,1814.61 h23.62
  text "PB10" at 4682.91,1814.61 h23.62
  text "PC13" at 5131.73,1769.33 h23.62
  text "PB13" at 4623.86,1767.36 h23.62
  text "PB6" at 4421.1,1765.39 h31.5
  text "PB7" at 4523.46,1765.39 h31.5
  text "PC0" at 4724.25,1765.39 h31.5
  text "PC1" at 4824.65,1765.39 h31.5
  text "PC2" at 4925.04,1765.39 h31.5
  text "PC3" at 5021.5,1765.39 h31.5

## Text inside footprints (layer, text, board x,y; h text height)
J1: Bottom Layer "MAGI" at 5340,1645 h31.5